# Altium PCB Capacitive Soil Moisture Sensor.PCBDOC
Units mil, origin at the board's own origin, x right, y up, seen from the top; angles counter-clockwise.
Board outline 621 x 3600.21 mil, 2 copper layers (Top Layer, Bottom Layer); 22 components, 19 nets, 90 pads, 2 vias.
Unrouted connection lines stored in the file: 41.
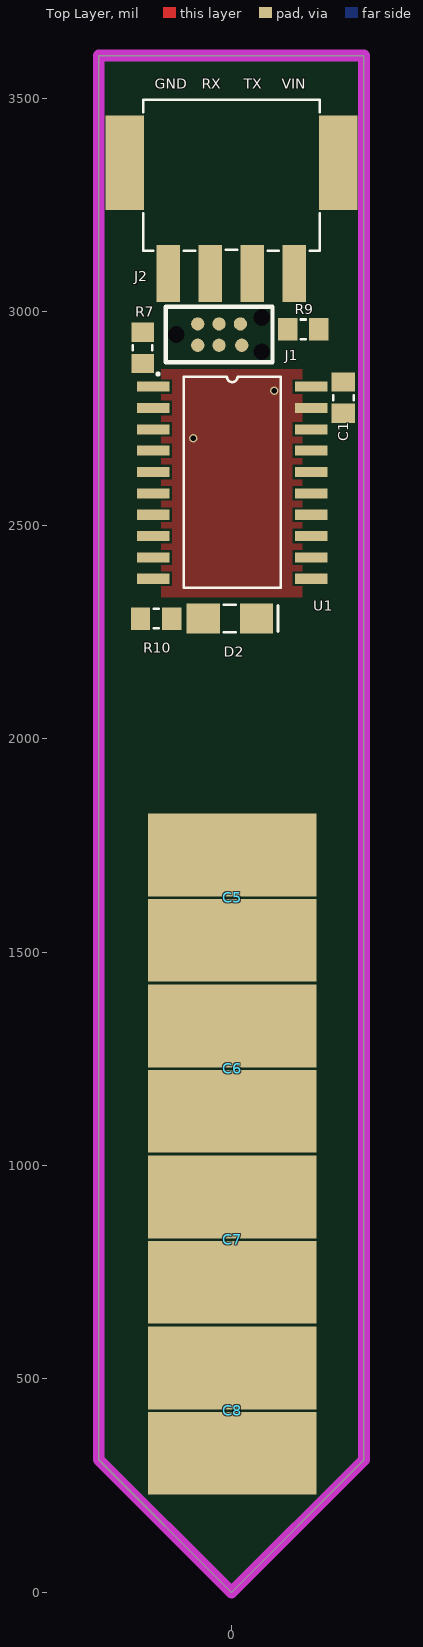
[diagram p0: Top Layer view]
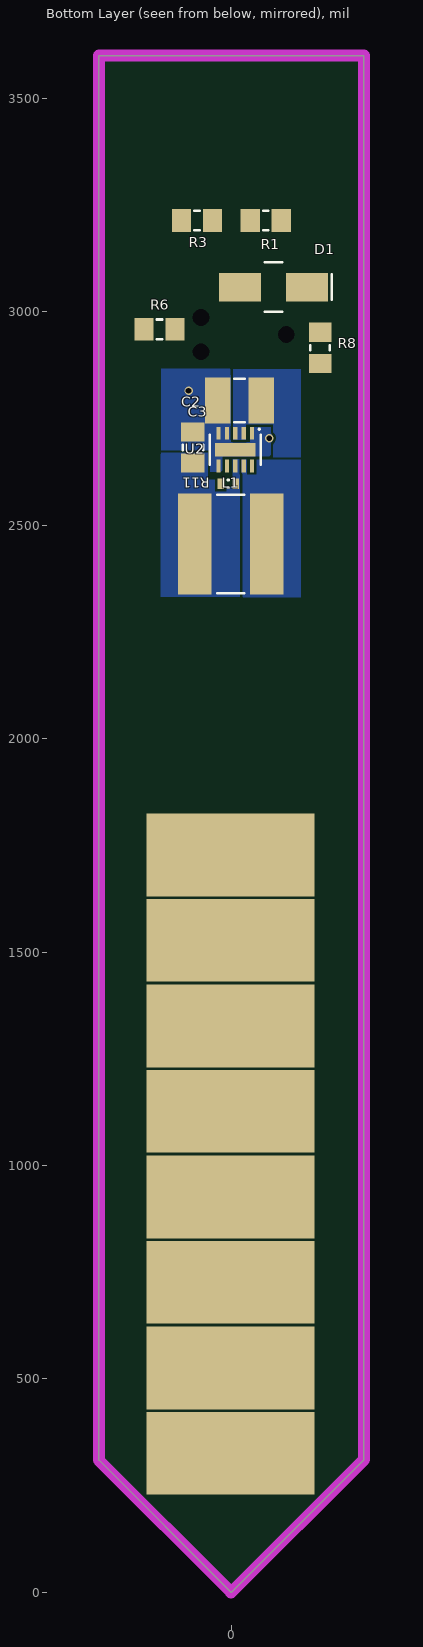
[diagram p1: Bottom Layer view, seen from below]

## Layer stack, top to bottom
Top Solder: solder mask 0.4, Solder Resist, Dk 3.5
Top Layer: signal copper 1.4
Dielectric1: core 12.6, FR-4, Dk 4.8
Bottom Layer: signal copper 1.4
Bottom Solder: solder mask 0.4, Solder Resist, Dk 3.5

## Board outline
-311,311 -311,3600.21 310,3600.21 310,310 0,0

## Design rules (kind name [scope] priority, off if disabled: settings)
AssemblyTestpoint [All] p1: testpointundercomponent=TRUE minsize=40 maxsize=100 preferedsize=60 minholesize=0 maxholesize=40 preferedholesize=32 testpointgrid=1 usegrid=FALSE gridtolerance=0.01 allowsidebottom=TRUE
Clearance "Hi-Power Clearance" [InNetClass('Hi-Power')] p1: gap=6
Clearance "Power Clearance" [InNetClass('Power')] p2: gap=10
Clearance "Signal Clearance" [All] p3: gap=6 // OSH Park
ComponentClearance "Fiducials and labels" [HasFootprint('Date Code Label') OR HasFootprint('Fiducial - Top Only') or HasFootprint('1 Pin 14-Gauge Wire Connector') OR HasFootprint('1 Pin 22-Gauge Wire Connector')] p1: gap=-1000 collisioncheckmode=3 verticalgap=5 showdistances=TRUE
ComponentClearance [All] p2: gap=5 collisioncheckmode=3 verticalgap=5 showdistances=TRUE
FabricationTestpoint [All] p1: side=2 testpointundercomponent=TRUE minsize=40 maxsize=100 preferedsize=60 minholesize=0 maxholesize=40 preferedholesize=32 testpointgrid=1 allowsidebottom=TRUE usegrid=FALSE gridtolerance=0.01
HoleSize "OSH Park Hole Size" [All] p1: absolutevalues=TRUE maxlimit=1000 minlimit=13 maxpercent=80.000 minpercent=20.000
HoleSize "Sunstone Hole Size" [All] p2: absolutevalues=TRUE maxlimit=251 minlimit=16 maxpercent=80.000 minpercent=20.000
MinimumAnnularRing [All] p1: minimumring=7 // OSH Park
MinimumSolderMaskSliver [(InComponentClass('Inside Board Components'))] p1: minsoldermaskwidth=0
NetAntennae "Guard Ring" [InNet('GUARD RING')] p1: netantennaetolerance=72738
NetAntennae [All] p2: netantennaetolerance=0
PolygonConnect "Hi-Power Polygon" [InNetClass('Hi-Power')] p1: connectstyle=Direct reliefconductorwidth=10 reliefentries=4 polygonreliefangle="45 Angle" airgapwidth=10
PolygonConnect [All] p2: connectstyle=Direct reliefconductorwidth=10 reliefentries=4 polygonreliefangle="90 Angle" airgapwidth=10
RoomDefinition "Flash programming" [InComponentClass('Flash programming')] p1: confinementstyle=ConfineIn formatcopy=TRUE lockcomponents=FALSE outline -20818.9,-20433.07 -18818.9,-20433.07 -18818.9,-19433.07 -20818.9,-19433.07
RoomDefinition "Diagnostic LED" [InComponentClass('Diagnostic LED')] p2: confinementstyle=ConfineIn formatcopy=TRUE lockcomponents=FALSE outline -20818.9,-20433.07 -18818.9,-20433.07 -18818.9,-19433.07 -20818.9,-19433.07
RoomDefinition 3.3VDC [InComponentClass('3.3VDC')] p3: confinementstyle=ConfineIn formatcopy=TRUE lockcomponents=FALSE outline -20818.9,-20433.07 -18818.9,-20433.07 -18818.9,-19433.07 -20818.9,-19433.07
RoutingPriority Hi-Power [InNetClass('Hi-Power')] p1: routingpriority=0
RoutingPriority "Non-Hi-Power Tracks" [All] p2: routingpriority=1
RoutingTopology "Analog Routing Topology" [InNet('ANALOG GROUND')] p1: topology=Starburst
RoutingTopology [All] p2: topology=Shortest
RoutingVias "Hi-Power Vias" [InNetClass('Hi-Power')] p1: holewidth=24 width=35 viastyle="Through Hole" minholewidth=24 minwidth=35 maxholewidth=24 maxwidth=35
RoutingVias "Power Vias" [InNetClass('Power')] p2: holewidth=13 width=20 viastyle="Through Hole" minholewidth=13 minwidth=20 maxholewidth=13 maxwidth=20
RoutingVias "Signal Vias" [All] p3: holewidth=13 width=20 viastyle="Through Hole" minholewidth=13 minwidth=20 maxholewidth=13 maxwidth=20
SMDNeckDown SMDNeckDown_1 [InNetClass('Power')] p1: percent=5000.000
SMDNeckDown [InNetClass('Extreme Hi-Power')] p2: percent=5000.000
ShortCircuit "Ground Short Circuit" [InNet('BRIDGE GROUND')      or InNet('GROUND') vs InNet('BRIDGE GROUND')      or InNet('GROUND')] p1: allowed=TRUE
ShortCircuit "Powers Short Circuit" [InNet('BRIDGE POWER')            or InNet('CONTROL POWER') vs InNet('BRIDGE POWER')            or InNet('CONTROL POWER')] p2: allowed=TRUE
ShortCircuit [All] p3: allowed=FALSE
SilkToSilkClearance [All] p1: silktosilkclearance=0
SilkToSolderMaskClearance SilkscreenOverComponentPads [IsPad] p1: minsilkscreentomaskgap=0 clearancetoexposedcopper=TRUE
SolderMaskExpansion Vias [IsVia] p1: expansion=-2
SolderMaskExpansion "Everything else" [All] p2: expansion=4
UnpouredPolygon [All] p1: allowunpoured=FALSE
Width "Hi-Power Width" [InNetClass('Hi-Power')] p1: maxlimit=35 minlimit=35 preferedwidth=35
Width "Power Width" [InNetClass('Power')] p2: maxlimit=10 minlimit=10 preferedwidth=10
Width "Signal width" [All] p3: maxlimit=6 minlimit=6 preferedwidth=6 // OSH Park
18 further rules are at their usual default settings.

## Classes and differential pairs
component class "Capacitive Soil Moisture Sensor Overview": J2
component class 3.3VDC: C2 C3 L1 R11 U2
component class "Capacitive Soil Moisture Sensor": C5 C6 C7 C8
component class "Flash programming": D1 J1 R6 R7 R8 R9
component class Microprocessor: C1 R1 R3 U1
net class Undefined: 3.3VDC GROUND NetL1_2 NetR11_2 VIN
component class "Diagnostic LED": D2 R10

## Components (designator, comment, footprint, x,y, rotation, side; value= is the part's Value field where it differs from the comment)
C1 "100nF 0805 100V" "C0805 - Ceramic" 262,2799 r270 top
C2 "2.2uF 1210 100V" "C1210 - Ceramic" -19.64,2792.08 r0 bottom
C3 "22uF 0805 6.3V" "C0805 - Ceramic" 90,2682 r90 bottom
C5 "Coplanar Capacitor" "Coplanar Capacitor" 1.69,1627.77 r0 top
C6 "Coplanar Capacitor" "Coplanar Capacitor" 1.69,1227.18 r0 top
C7 "Coplanar Capacitor" "Coplanar Capacitor" 1.69,826.59 r0 top
C8 "Coplanar Capacitor" "Coplanar Capacitor" 1.69,426 r0 top
D1 "Schottky Diode 60V 3A" SMA -99,3058 r180 bottom
D2 "Green LED 1206" "LED - 1206 Green" -4.06,2281.32 r0 top
J1 "Tag Connect" "Tag Connect - No Legs" -129.21,2946.59 r0 top
J2 "4-Position Screwless Connector 2.5mm Pitch Right Angle" "4-Position Screwless Connector 2.5mm pitch Right Angle" 0,3280 r180 top locked
L1 "10uH 2.5A" "Inductor 6mm x 6mm x 4.5mm" 1.19,2455.97 r180 bottom
R1 "100R 0805 1%" R0805 -81,3214 r0 bottom
R3 "100R 0805 1%" R0805 80,3214 r180 bottom
R6 "10k 0805 1%" R0805 168,2959 r180 bottom
R7 "100R 0805 1%" R0805 -208.23,2915.59 r270 top
R8 "100R 0805 1%" R0805 -208.23,2915.59 r90 bottom
R9 "100R 0805 1%" R0805 168,2959 r180 top
R10 "255R 0805 1%" R0805 -176.46,2281.32 r180 top
R11 "100k 0402 1%" R0402 7,2597 r0 bottom
U1 "Microcontroller PIC24F16KA101" SOIC-20 1.69,2600.21 r0 top
U2 "SMPS Synchronous Buck" WSON-10 -9.63,2677.08 r270 bottom

## Footprints (in the part's own frame and the unit in brackets; to place one, negate y for a bottom-side part, rotate by r counter-clockwise, add the part's x,y. Pads: shape width x height; smd on the part's side, far side on the other; paste and mask are expansions set on the pad)
"4-Position Screwless Connector 2.5mm pitch Right Angle" [mm]
  rect 2.3x5.6 smd: 0(-6.341,-1.757) 0(6.359,-1.757)
  rect 1.4x3.4 smd: 1(3.759,4.843) 2(1.259,4.843) 3(-1.241,4.843) 4(-3.741,4.843)
  silkscreen extent -5.25,-5.5 5.25,3.48, body extent -7.2,-5.5 7.2,5.5, height 5.01
"C0805 - Ceramic" [mil]
  rect 45x55 smd: 1(-36.5,0) 2(36.5,0)
  silkscreen extent -6,-24 6,24, body extent -39,-25 39,25, height 31
"C1210 - Ceramic" [mil]
  rect 60x108 smd: 1(-50.71,0.13) 2(50.71,0.13)
  silkscreen extent -12,-51 12,51, body extent -79,-49 79,49, height 67
"Coplanar Capacitor" [mil]
  rect 394x194 smd paste-98.43 mask+4: 1(0,-100) 2(0,100)
  rect 394x194 smd far side paste-98.43 mask+4: 1(0,-100) 2(0,100)
"Inductor 6mm x 6mm x 4.5mm" [mm]
  rect 2x6 smd: 1(-2.15,0) 2(2.15,0)
  silkscreen extent -0.81,-2.92 0.81,2.92, body extent -3,-3 3,3, height 4.5
"LED - 1206 Green" [mil]
  rect 78x70 smd: 1(-62.5,0) 2(62.5,0)
  silkscreen extent -14,-32 113,32, body extent -63,-31 63,31, height 43
R0402 [mil]
  rect 16x24 smd: 1(-17.5,0) 2(17.5,0)
  silkscreen extent -1,-9 1,9, body extent -23,-11 23,11, height 16
R0805 [mil] "SMT"
  rect 45x53 smd: 1(-36.47,0) 2(36.47,0)
  silkscreen extent -6,-23 6,23, body extent -39,-25 39,25, height 31
SMA [mm]
  rect 2.5x1.7 smd: 1(-2,0) 2(2,0)
  silkscreen extent -0.51,-1.47 3.48,1.47, body extent -2.8,-1.48 2.8,1.47, height 2.7
SOIC-20 [mm]
  rect 1.95x0.6 smd: 1(-4.7,5.7) 2(-4.7,4.43) 3(-4.7,3.16) 4(-4.7,1.89) 5(-4.7,0.62) 6(-4.7,-0.65) 7(-4.7,-1.92) 8(-4.7,-3.19) 9(-4.7,-4.46) 10(-4.7,-5.73) 11(4.7,-5.73) 12(4.7,-4.46) 13(4.7,-3.19) 14(4.7,-1.92) 15(4.7,-0.65) 16(4.7,0.62) 17(4.7,1.89) 18(4.7,3.16) 19(4.7,4.43) 20(4.7,5.7)
  silkscreen extent -4.5,-6.27 2.89,6.53, body extent -5.2,-6.32 5.2,6.28, height 2.6
"Tag Connect - No Legs" [mm] "No Legs"
  round 0.9 hole 0.995 unplated: 0(0,0) 0(5.08,-1.016) 0(5.08,1.016)
  round 0.79 smd paste-0.39: 1(1.27,-0.635) 2(1.27,0.635) 3(2.54,-0.635) 4(2.54,0.635) 5(3.89,-0.635) 6(3.81,0.635)
  silkscreen extent -0.64,-1.65 5.71,1.65
WSON-10 [mm]
  rect 0.79x2.4 smd: 0(0,0)
  rect 0.75x0.25 smd mask+0: 1(-0.97,1) 2(-0.97,0.5) 3(-0.97,0) 4(-0.97,-0.5) 5(-0.97,-1) 6(0.97,-1) 7(0.97,-0.5) 8(0.97,0) 9(0.97,0.5) 10(0.97,1)
  silkscreen extent -1.27,-1.52 0.89,1.52, body extent -1.05,-1.55 1.05,1.55, height 0.8

## Part data
L1: "6mm x 6mm x 4.5mm"
R1 R3 R7 R8 R9 R10: "1/8W"
R6: "Resistor"
R11: "1/16W"
U1: "16-Bit Flash Microcontroller with nanoWatt XLP Technology, 16KB Flash, 1.5KB SRAM, 20-Pin SOIC, Industrial Temperature"
U2: "Vout 1-6V"

## Via types
v1: diameter 20, hole 13, Top Layer to Bottom Layer, 2 vias

## Nets (pads, with @x,y where several pads share a name; then routed paths per layer and width w, separated by ;. In a path a pad name is that pad's centre, name@x,y a point inside that pad or via, vN(x,y) a via of type N, cw(c..) or ccw(c..) an arc to the next point about the centre after c; other vN are vias at no path point)
3.3VDC: C1.1 C3.1 J1.2 L1.1 R6.1 R11.1 U1.20 U2.8 U2.10
DIAGNOSTIC: R10.2 U1.10
GROUND: C1.2 C2.2 C3.2 C5.1 C6.1 C7.1 C8.1 D2.2 J1.3 J2.4 U1.19 U2.0 U2.1 U2.4 U2.5 U2.6
  other v1: -89.36,2704 100,2815
"ICSP CLOCK": R9.1 U1.5
"ICSP DATA": R8.1 U1.4
MCLR: D1.2 R7.1 U1.1
NetC5_2: C5.2 C6.2 C7.2 C8.2 U1.14
NetD1_1: D1.1 R6.2
NetD2_1: D2.1 R10.1
NetJ1_1: J1.1 R7.2
NetJ1_4: J1.4 R8.2
NetJ1_5: J1.5 R9.2
NetL1_2: L1.2 U2.9
NetR1_1: R1.1 U1.6
NetR3_1: R3.1 U1.11
NetR11_2: R11.2 U2.7
"SIGNAL RX": J2.2 R1.2
"SIGNAL TX": J2.3 R3.2
VIN: C2.1 J2.1 U2.2 U2.3
pads on no net: J1.0 J1.6 J2.0 U1.2 U1.3 U1.7 U1.8 U1.9 U1.12 U1.13 U1.15 U1.16 U1.17 U1.18

## Polygon pours and split planes (outlines as drawn)
VIN on Bottom Layer "Top Layer-No Net" (solid, pour order 7): -4.56,2700.19 -34.08,2700.19 -34.08,2736.61 -99.04,2736.61 -99.04,2659.83 -163.02,2659.83 -163.02,2865.54 -4.56,2865.54
GROUND on Bottom Layer "Top Layer-No Net" (solid, pour order 9): -95.69,2731.12 -44.5,2731.12 -44.5,2694.7 -1.2,2694.7 -1.2,2866.94 164.16,2866.94 164.16,2676 49,2676 49,2625.8 17.5,2625.8 17.5,2661.24 -95.69,2661.24
3.3VDC on Bottom Layer "Top Layer-No Net" (solid, pour order 10): 55.38,2606.62 55.38,2669.61 164.64,2669.61 164.64,2333 -20.4,2333 -20.4,2654.85 -3.67,2654.85 -3.67,2588.9 24.87,2588.9 24.87,2606.62
NetL1_2 on Bottom Layer "Top Layer-No Net" (solid, pour order 11): -24.06,2653.54 -36.85,2653.54 -36.85,2618.11 -59.49,2618.11 -59.49,2653.54 -162.84,2653.54 -162.84,2331.69 -24.06,2331.69
GROUND on Top Layer "Ground" (solid, remove dead copper, pour order 8): 166.06,2865.97 -164.64,2865.97 -164.64,2331.52 166.06,2331.52

## Keep-outs
Keep-Out Layer:
  the board outline again, w28

## Silkscreen, mask and mechanical layers (free items; w line width, h text height)
Top Overlay:
  text "GND" at -179.99,3523 h24
  text "RX" at -69.57,3523 h24
  text "TX" at 28.85,3523 h24
  text "VIN" at 117.28,3523 h24
Board Outline (M1):
  lines w5: -259.84,259.84 0,0 254.15,254.16 254.15,3600.21 -259.84,3600.21 -259.84,259.84